# EAGLE board textdisplay (EAGLE 7.3.0)
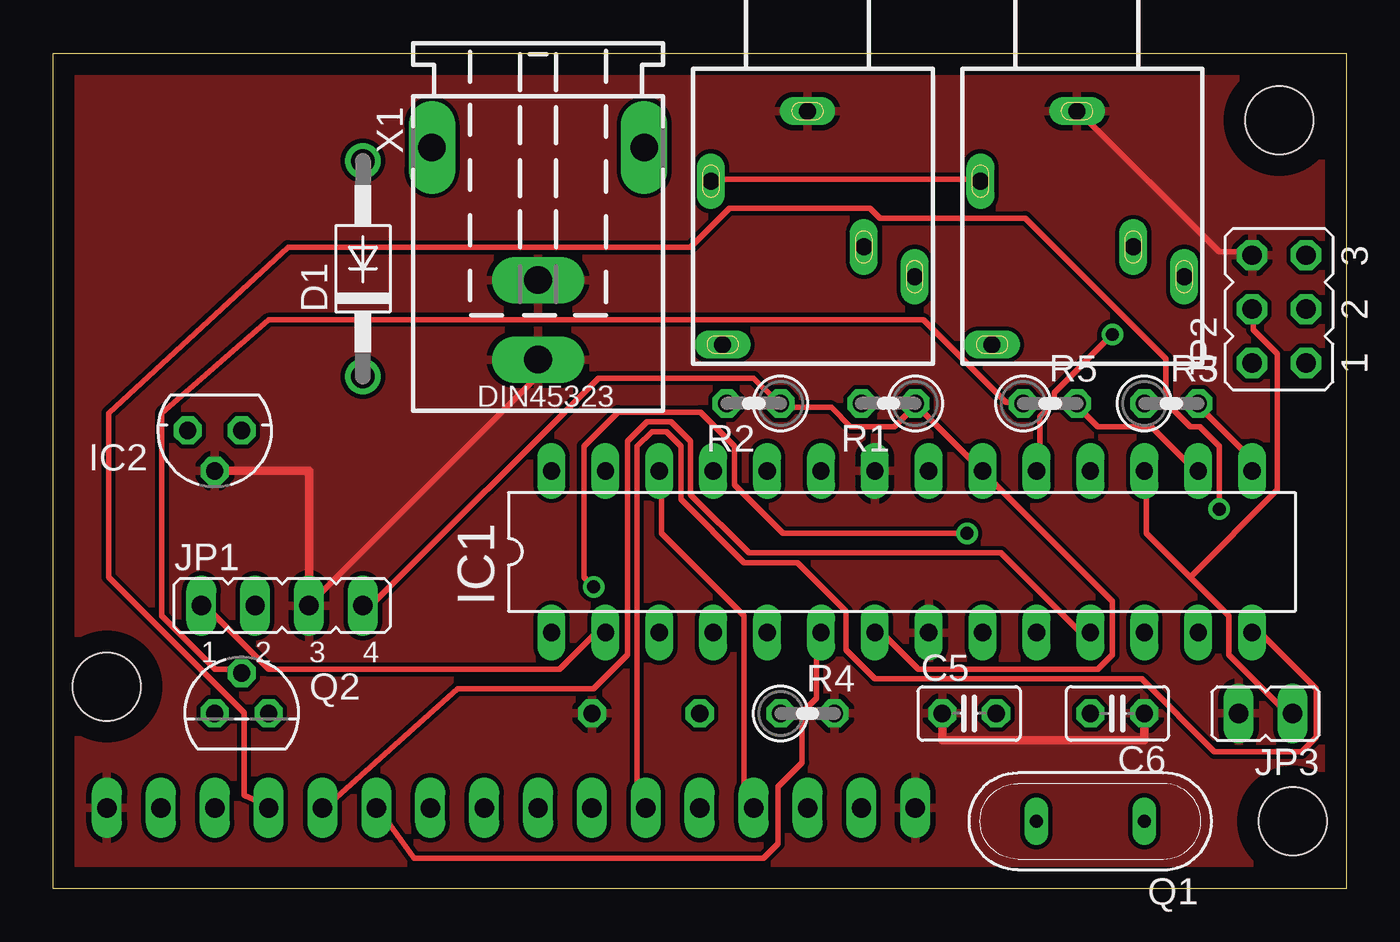
[diagram p0: board, top side]
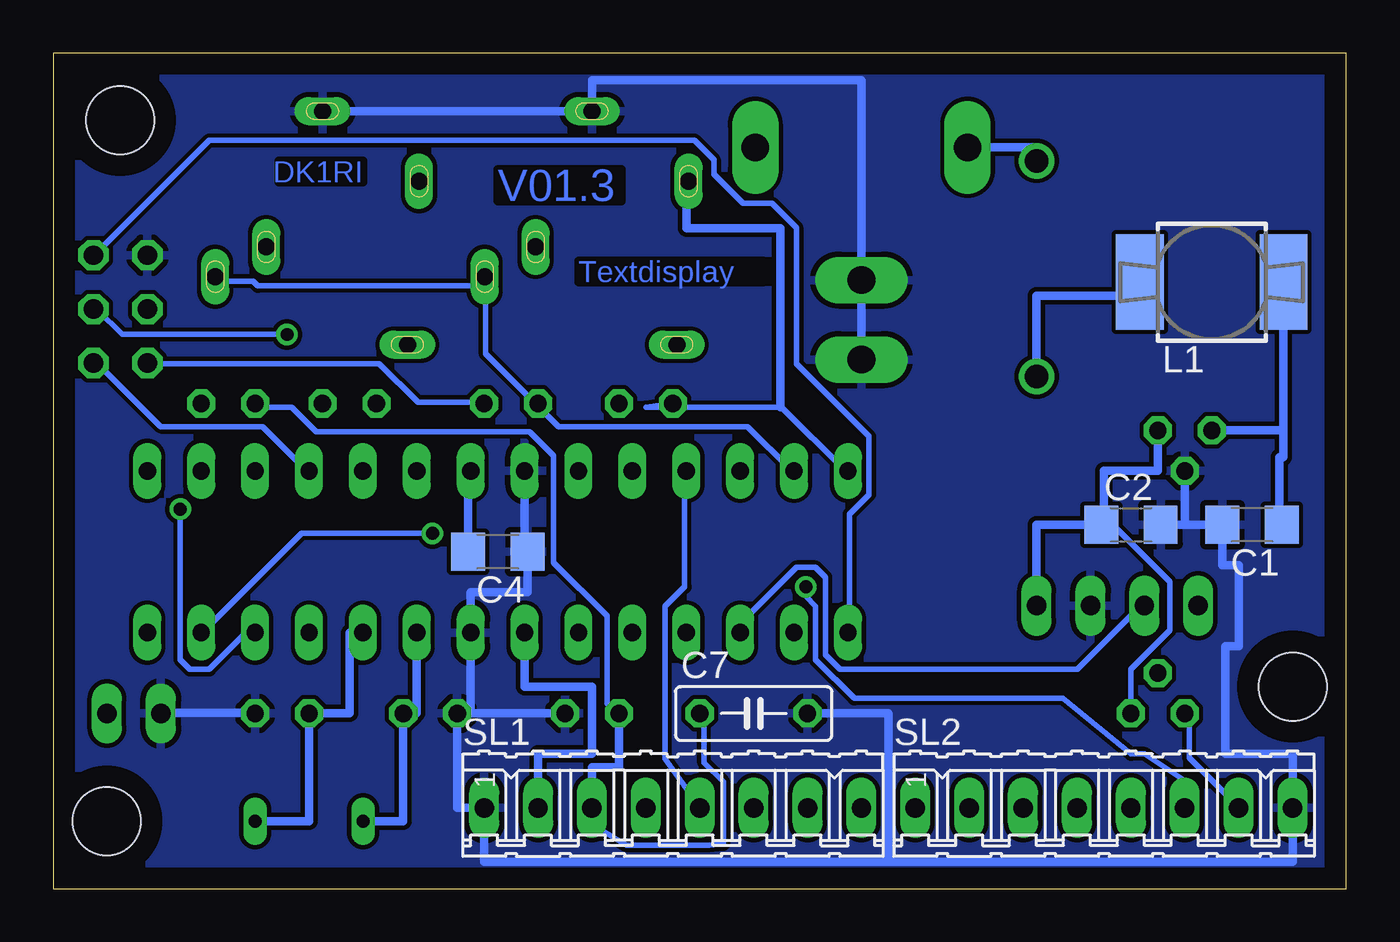
[diagram p1: board, bottom side, seen from below]

Size 60.96 x 39.37 mm. Coordinates in mm from the lower left corner, seen from the top.
Outline: 0,0 0,39.37 60.96,39.37 60.96,0 0,0
Copper layers (1*16): Top 0.035mm / dielectric 1.5mm / Bottom 0.035mm
Design rules "default": minimum track width 10mil, minimum drill 24mil, track to track 8mil, track to pad 8mil, pad to pad 8mil, via to via 8mil, smd to smd 8mil, copper to edge 40mil, drill to drill 8mil, minimum pad ring 10mil, minimum via ring 8mil, stop-mask expansion 4mil, vias tented up to drill 0mil, thermal gap 10mil
Holes 3.2 mm at 58.42,3.17 2.54,9.53 57.79,36.2

## Footprints (pad centres in the part's own frame; a part is rotated, then mirrored left to right if it is on the bottom)
C1206 = smd 1.6 x 1.8: 1 -1.4,0; 2 1.4,0
C025-025X050 = drill 0.813 octagon: 1 -1.27,0; 2 1.27,0
C050-025X075 = drill 0.813 octagon: 1 -2.54,0; 2 2.54,0
DO41-10 = drill 1.118: A 5.08,0; C -5.08,0
DIL28-3 = drill 0.813 long: 1 -16.51,-3.81; 2 -13.97,-3.81; 3 -11.43,-3.81; 4 -8.89,-3.81; 5 -6.35,-3.81; 6 -3.81,-3.81; 7 -1.27,-3.81; 8 1.27,-3.81; 9 3.81,-3.81; 10 6.35,-3.81; 11 8.89,-3.81; 12 11.43,-3.81; 13 13.97,-3.81; 14 16.51,-3.81; 15 16.51,3.81; 16 13.97,3.81; 17 11.43,3.81; 18 8.89,3.81; 19 6.35,3.81; 20 3.81,3.81; 21 1.27,3.81; 22 -1.27,3.81; 23 -3.81,3.81; 24 -6.35,3.81; 25 -8.89,3.81; 26 -11.43,3.81; 27 -13.97,3.81; 28 -16.51,3.81
78LXX = drill 0.813 octagon: GND 0,1.905; IN 1.27,0; OUT -1.27,0
JP4 = drill 0.914 long: 1 -3.81,0; 2 -1.27,0; 3 1.27,0; 4 3.81,0
JP3Q = drill 0.914 octagon: 1 -2.54,-1.27; 2 -2.54,1.27; 3 0,-1.27; 4 0,1.27; 5 2.54,-1.27; 6 2.54,1.27
JP1 = drill 0.914 long: 1 0,-1.27; 2 0,1.27
MS85 = smd 4.5 x 2.25: 1 0,-3.383; 2 0,3.383
QS = drill 0.61 long: 1 -2.54,0; 2 2.54,0
TO92 = drill 0.813 octagon: 1 1.27,0; 2 0,1.905; 3 -1.27,0
0207/2V = drill 0.813 octagon: 1 -1.27,0; 2 1.27,0
08P = drill 0.914 long: 1 -8.89,0; 2 -6.35,0; 3 -3.81,0; 4 -1.27,0; 5 1.27,0; 6 3.81,0; 7 6.35,0; 8 8.89,0
737992-5 = drill 1.3 pad 2.184 long: + 0,10; -1 5,0; -2 -5,0; K 0,6.25
1503_09 = drill 0.8 pad 1.2 long: 1 0,-2.1; 2 -4.55,-5.4; 3 5.05,-9.9; 4 -4,-13.1; 5 2.65,-8.5

## Placement (x,y rotation side)
C1  22u  [C1206]  4.45,17.14 180 bottom
C2  22u  [C1206]  10.16,17.14 0 bottom
C4  22u  [C1206]  40.01,15.88 180 bottom
C5  18pF  [C025-025X050]  43.18,8.26 0 top
C6  18pF  [C025-025X050]  50.16,8.26 180 top
C7  100n  [C050-025X075]  27.94,8.26 0 bottom
D1  1N4004  [DO41-10]  14.61,29.21 90 top
IC1  MEGA8-P  [DIL28-3]  40.01,15.88 0 top
IC2  78L05  [78LXX]  7.62,21.59 180 top
JP1  USB  [JP4]  10.8,13.34 0 top
JP2  ISP  [JP3Q]  57.79,27.3 90 top
JP3  Reset  [JP1]  57.15,8.26 90 top
L1  22u  [MS85]  6.35,28.57 270 bottom
Q1  20MHz  [QS]  48.9,3.17 180 top
Q2  BC307  [TO92]  8.89,8.26 0 top
R1  4k7  [0207/2V]  39.37,22.86 180 top
R2  4k7  [0207/2V]  33.02,22.86 180 top
R3  1k  [0207/2V]  52.71,22.86 0 top
R4  10k  [0207/2V]  35.56,8.26 0 top
R5  4k7  [0207/2V]  46.99,22.86 0 top
SL1  SL1  [08P]  31.75,3.81 0 bottom
SL2  SL2  [08P]  11.43,3.81 0 bottom
X1  8-15V  [737992-5]  22.86,34.93 180 top
X2  1503_09  [1503_09]  35.56,38.73 0 top
X3  1503_09  [1503_09]  48.26,38.73 0 top

## Library data of the parts
C1 C2 C4-C7 R1-R5 = resistor
D1 = diode
IC1 = atmel; OC_FARNELL: unknown; OC_NEWARK: unknown
IC2 = v-reg
JP1-JP3 = jumper
L1 = inductor-neosid; OC_FARNELL: unknown; OC_NEWARK: unknown
Q1 = special
Q2 = transistor-pnp
SL1 SL2 = con-amp-quick; OC_FARNELL: unknown; OC_NEWARK: unknown
X1 = con-conrad
X2 X3 = con-lumberg; OC_FARNELL: 1243244; OC_NEWARK: unknown

## Nets
-: IC1.15 R3.2
BRIGHT: Q2.3 SL2.7
CONTRAST: C7.1 R3.1 R4.1 SL1.3
D4: IC1.6 SL2.3
D5: IC1.11 SL2.4
D6: IC1.12 SL2.5
D7: IC1.13 SL2.6
E: IC1.14 SL1.6
GND: C1.2 C2.2 C4.1 C5.1 C6.1 C7.2 IC1.8 IC1.22 IC2.GND JP1.3 JP2.6 JP3.2 R4.2 SL1.1 SL2.8 X1.+ X1.K X2.1 X3.1
MISO: IC1.18 JP2.1
MOSI: IC1.17 JP2.4 JP3.1
N$1: D1.C L1.1
N$2: IC1.16 R5.2
N$4: Q2.2 R5.1
N$18: C1.1 IC2.IN L1.2
N$19: C5.2 IC1.9 Q1.2
N$25: D1.A X1.-1
N$35: C4.2 IC1.21
N$37: C6.2 IC1.10 Q1.1
R/W: IC1.25 SL1.5
RESET: IC1.1 JP2.5
RS: IC1.26 SL1.4
RXD: IC1.2 JP1.1
SCK: IC1.19 JP2.3
SCL: IC1.28 R2.2 X2.2 X3.2
SDA: IC1.27 R1.2 X2.3 X3.3
TXD: IC1.3 JP1.2
VDD: C2.1 IC1.7 IC1.20 IC2.OUT JP1.4 JP2.2 Q2.1 R1.1 R2.1 SL1.2

## Tracks (layer width: path | path; a pad name or v marks a point on that pad's centre or on a via)
-
  Top 0.254: IC1.15 56.34,19.71 56.34,20.4 54.05,22.68 R3.2
BRIGHT
  Bottom 0.254: Q2.3 7.42,8.05 7.42,6.17 5.13,3.89 SL2.7
CONTRAST
  Bottom 0.254: C7.1 30.28,8.05 30.28,5.94 29.36,5.03 29.36,2.11 30.05,2.06 33.93,2.06 35.54,3.02 SL1.3 | R3.1 51.31,22.68 49.71,22.68 48.57,21.54 38.51,21.54 37.36,20.4 37.36,15.37 34.85,12.85 34.85,8.74 34.39,8.28 R4.1
  Bottom 0.406: SL1.3 35.56,5.71 34.29,5.71 R4.1
D4
  Top 0.254: IC1.6 35.99,11.94 35.99,8.97 35.31,8.28 35.31,5.94 34.16,4.8 34.16,2.11 33.48,1.42 17.02,1.42 15.42,3.66 SL2.3
D5
  Top 0.254: IC1.11 48.79,12.17 48.34,12.17 44.68,15.82 32.79,15.82 30.05,18.57 30.05,21.08 29.13,22 27.99,22 27.08,21.08 27.08,11.02 25.48,9.42 19.08,9.42 12.9,3.89 SL2.4
D6  (via drill 0.61)
  Top 0.254: v54.97,17.88 54.97,20.85 54.05,21.77 53.59,21.77 52.45,22.91 52.45,24.97 45.82,31.6 38.96,31.6 38.51,32.05 31.88,32.05 30.05,30.23 11.07,30.23 2.62,22.4 2.62,14.68 9.02,8.28 9.02,4.39 10.16,3.89 SL2.5
  Bottom 0.254: v54.97,17.88 54.97,10.79 54.51,10.34 53.59,10.34 51.99,11.94 51.54,11.94 IC1.12
D7  (via drill 0.61)
  Top 0.254: v43.08,16.74 34.39,16.74 32.11,19.02 32.11,20.85 30.51,22.45 26.62,22.45 25.02,20.85 25.02,14.68 v25.48,14.22
  Bottom 0.254: v43.08,16.74 49.25,16.74 53.82,12.17 IC1.13 | v25.48,14.22 25.48,13.77 25.02,13.31 25.02,10.79 23.19,8.97 13.36,8.97 10.16,6.35 9.53,6.35 7.62,5.08 7.62,3.89 7.64,3.89 SL2.6
E
  Top 0.254: IC1.14 56.57,11.94 57.02,11.94 59.54,9.42 59.54,7.14 58.85,6.45 54.74,6.45 51.31,9.88 38.73,9.88 37.36,11.25 37.36,13.08 35.08,15.37 32.56,15.37 29.59,18.34 29.59,20.85 28.91,21.54 28.22,21.54 27.53,20.85 27.53,4.12 27.76,3.89 SL1.6
GND
  Top 0.254: 12.68,14 12.22,13.54 JP1.3 12.68,14 | 12.68,14 22.73,24.05 22.73,24.74 X1.+ | JP2.6 56.34,30 54.97,30 48.34,36.63 X3.1
  Top 0.406: C5.1 41.91,6.99 51.43,6.99 C6.1 | 12.22,13.54 12.07,13.54 12.07,19.68 IC2.GND
  Bottom 0.254: 51.54,8.28 C6.1
  Bottom 0.406: C2.2 7.62,17.14 | 7.62,17.14 C1.2 5.85,15.24 5.08,15.24 5.08,11.43 5.71,11.43 5.71,6.35 2.54,6.35 SL2.8 2.54,1.27 21.59,1.27 | IC1.22 38.73,15.88 C4.1 38.61,13.97 41.27,13.97 IC1.8 41.27,8.26 | X3.1 X2.1 35.56,38.1 22.86,38.1 X1.K X1.+ | 51.54,8.28 55.88,8.28 JP3.2 | C7.2 21.59,8.26 21.59,1.27 | 21.59,1.27 40.64,1.27 SL1.1 41.91,3.81 C5.1 41.27,8.26 | R4.2 41.27,8.26 | IC2.GND 7.62,17.14
  pour Bottom: 60.32,38.73 0.64,38.73 0.64,0.64 60.32,0.64
  pour Top: 60.32,38.73 0.64,38.73 0.64,0.64 60.32,0.64
MISO
  Bottom 0.254: IC1.18 49.02,19.71 51.08,21.77 55.88,21.77 58.85,24.74 JP2.1
MOSI
  Top 0.254: 53.59,14.68 55.42,12.85 55.42,11.02 58.4,8.05 JP3.1 | 53.59,14.68 51.54,16.74 51.54,19.48 IC1.17 | 53.59,14.68 57.71,18.8 57.71,25.2 56.57,26.34 56.57,27.25 JP2.4
N$1
  Bottom 0.406: 10.16,28.57 10.16,29.21 9.73,29.21 | 9.53,29.21 9.73,29.21 | 9.73,29.21 L1.1 9.73,27.94 14.61,27.94 D1.C
N$2
  Top 0.254: IC1.16 53.82,19.71 51.77,21.77 49.25,21.77 48.34,22.68 R5.2
N$4
  Top 0.254: Q2.2 8.79,10.34 7.64,10.34 5.13,12.85 5.13,22.4 10.16,26.8 41.02,26.8 44.91,22.91 45.59,22.91 R5.1
N$18
  Bottom 0.406: C1.1 3.18,17.14 3.18,20.32 2.97,20.32 2.97,21.59 | 2.97,21.59 L1.2 | 2.97,21.59 IC2.IN
N$19
  Bottom 0.406: Q1.2 44.45,3.17 C5.2 43.81,8.26 IC1.9
N$25
  Bottom 0.406: X1.-1 14.61,34.93 D1.A
N$35
  Bottom 0.406: IC1.21 41.41,19.68 C4.2
N$37
  Bottom 0.406: Q1.1 48.9,3.17 C6.2 46.99,8.26 46.99,12.06 IC1.10
R/W
  Bottom 0.254: IC1.25 31.19,19.48 31.19,14.22 32.11,13.31 32.11,6.12 30.51,3.89 SL1.5
RESET
  Bottom 0.254: IC1.1 23.42,12.17 23.42,17.65 22.5,18.57 22.5,21.31 25.93,24.74 25.93,31.14 27.08,32.28 28.45,32.28 29.82,33.66 29.82,34.34 30.73,35.26 53.59,35.26 58.85,30 JP2.5
RS
  Top 0.254: IC1.26 28.68,19.48 28.68,16.74 32.56,12.85 32.56,4.34 33.02,3.89 SL1.4
RXD
  Top 0.254: IC1.2 25.93,11.94 25.48,11.94 23.88,10.34 10.16,10.34 7.19,13.31 JP1.1
SCK  (via drill 0.61)
  Top 0.254: v49.94,26.11 47.19,23.37 47.19,22.91 46.51,22.22 46.51,19.71 IC1.19
  Bottom 0.254: v49.94,26.11 57.71,26.11 58.85,27.25 JP2.3
SCL
  Top 0.254: X3.2 43.54,33.43 31.19,33.43 X2.2
  Bottom 0.254: IC1.28 23.65,19.71 26.62,22.68 26.67,22.68 33.02,22.68 R2.2
  Bottom 0.406: X2.2 31.12,33.34 31.12,31.11 26.67,31.11 26.67,22.68
SDA
  Bottom 0.254: 40.56,28.4 40.56,25.2 38.28,22.91 R1.2 38.05,22.68 37.13,21.77 28.22,21.77 26.16,19.71 IC1.27 | 40.56,28.4 40.56,28.63 X2.3 40.56,28.4 | 40.56,28.4 51.31,28.4 51.54,28.63 53.14,28.63 X3.3
TXD
  Bottom 0.254: IC1.3 28.45,12.17 28.45,12.62 25.93,15.14 25.02,15.14 24.56,14.68 24.56,11.02 23.88,10.34 12.68,10.34 9.7,13.31 JP1.2
VDD
  Top 0.254: IC1.7 38.73,11.94 39.19,11.94 40.79,10.34 49.25,10.34 49.94,11.02 49.94,13.54 43.99,19.48 IC1.20 43.76,19.71 40.79,22.68 R1.1 40.56,22.68 39.65,21.77 37.59,21.77 36.68,22.68 34.39,22.68 R2.1 34.16,22.91 33.02,24.05 25.7,24.05 15.19,13.54 14.73,13.54 JP1.4
  Bottom 0.254: Q2.1 10.16,10.34 8.33,12.17 8.33,14.45 11.3,17.42 C2.1 | JP2.2 56.34,24.74 45.59,24.74 43.76,22.91 40.79,22.91 R1.1
  Bottom 0.406: SL1.2 38.1,6.35 35.56,6.35 35.56,9.53 38.73,9.53 IC1.7 | JP1.4 14.61,17.14 C2.1 11.43,17.14 11.43,19.68 8.89,19.68 IC2.OUT

## Text on the board
Bottom: DK1RI | V01.3 | Textdisplay